# Altium PCB ultrazohm_digital_voltage_3U_1vxx.PcbDoc (part 4 of 4)
Units mm, origin at the board's own origin, x right, y up, seen from the top; angles counter-clockwise.
Board outline 155.99 x 100 mm, 4 copper layers (Top Layer, Layer 1, Layer 2, Bottom Layer), stack 0.98 mm thick; 148 components, 295 nets, 1106 pads, 423 vias.
Unrouted connection lines stored in the file: 171.
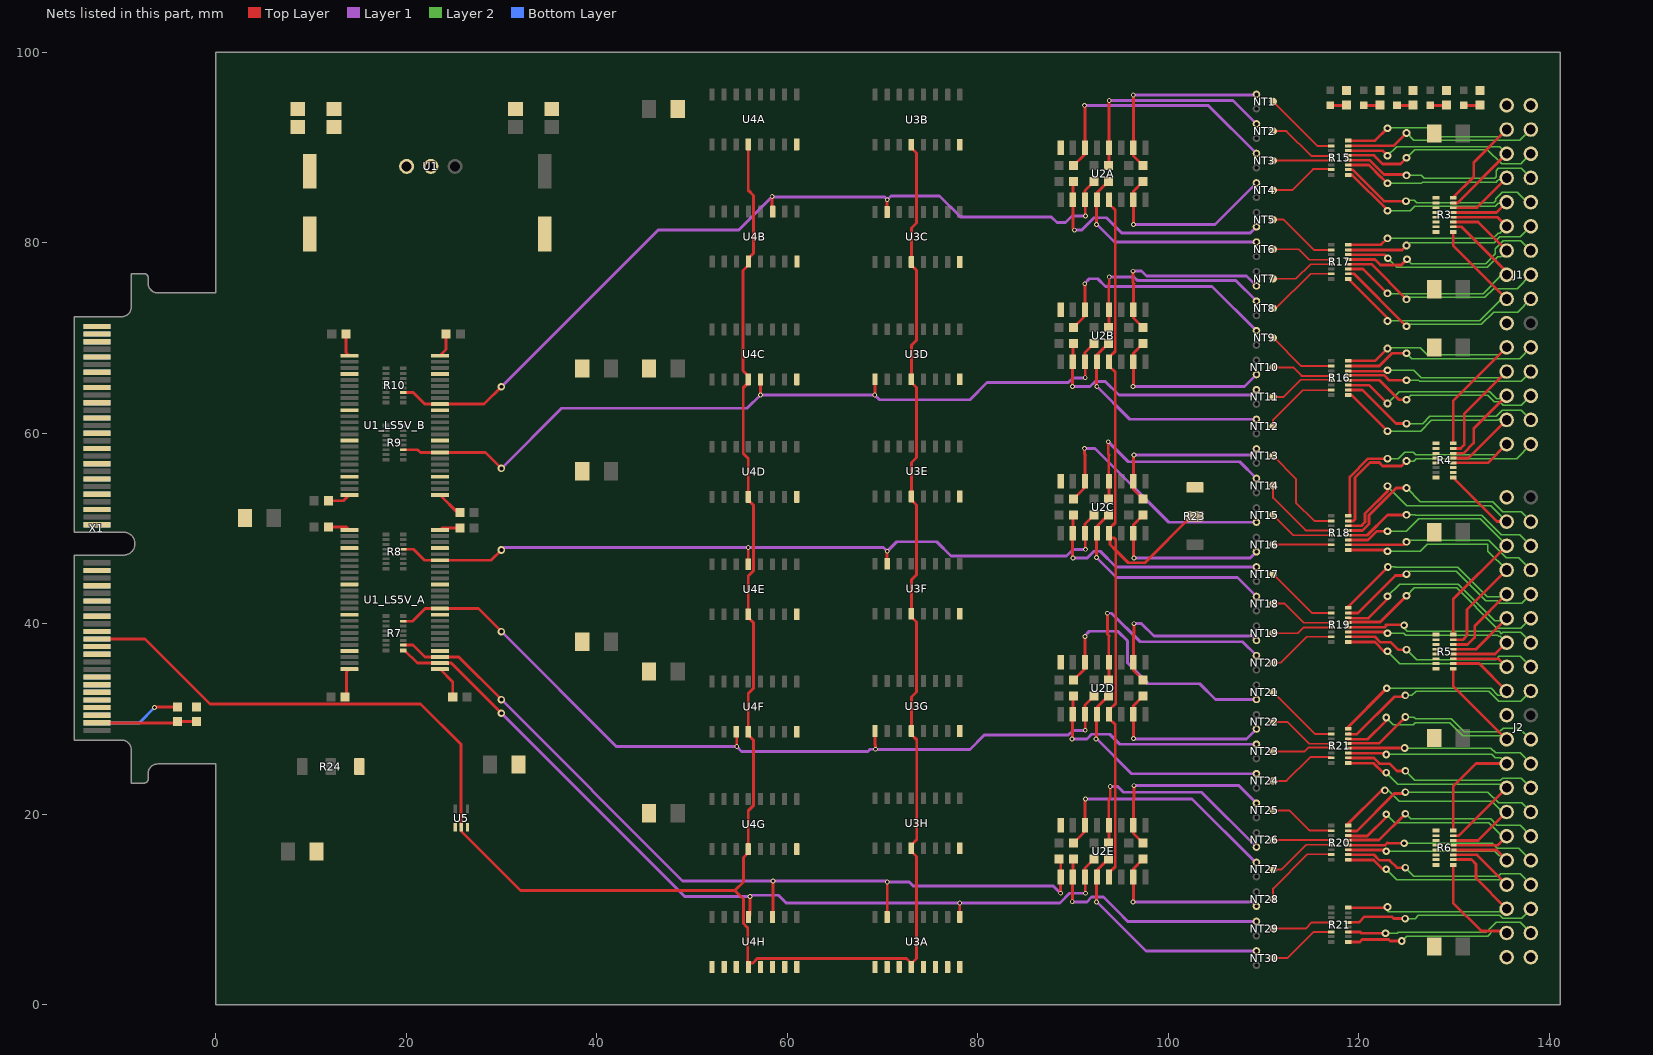
[diagram p5: the nets of this part, all layers, seen from the top]

## Via types
v1: diameter 0.5, hole 0.3, Top Layer to Bottom Layer, 244 vias
v2: diameter 0.8, hole 0.4, Top Layer to Bottom Layer, 120 vias
v3: diameter 0.5/0.5/0.5/0.5 (per signal layer), hole 0.3, Top Layer to Bottom Layer, 59 vias

## Nets (pads, with @x,y where several pads share a name; then routed paths per layer and width w, separated by ;. In a path a pad name is that pad's centre, name@x,y a point inside that pad or via, vN(x,y) a via of type N, cw(c..) or ccw(c..) an arc to the next point about the centre after c; other vN are vias at no path point) (continued)
DIG_IO_5V_E5: R7.10 R32E.1 U1_LS5V_A.3 U2E.9 U3A.15 U4H.11 | length 91
  Top Layer w0.3: R7.10@19.696,37.75 20.72,37.75 21.972,36.498 U1_LS5V_A.3@23.546,36.498 25.53,36.498 v2(30,32.028) ; U4H.11@58.468,9.225 58.5,9.257 v1(58.5,13) ; U3A.15@70.5,9.381 v3(70.5,12.9) ; R32E.1@88.55,15.3 88.71,15.14 U2E.9@88.71,13.4 ; U2E.9@88.68,13.55 88.68,11.72 v3(88.7,11.7)
  Layer 1 w0.3: v2(30,32.028) 49.028,13 v1(58.5,13) 70.4,13 v3(70.5,12.9) 72.807,12.9 73.257,12.45 87.95,12.45 v3(88.7,11.7) v3@88.68,11.72
DIG_IO_5V_F1: R10.11 R33A.1 U1_LS5V_B.16 U2A.11 U3C.15 U4B.11 | length 89.8
  Top Layer w0.3: R10.11@19.696,64.25 20.747,64.25 21.957,63.041 U1_LS5V_B.16@23.558,63.041 28.178,63.041 v2(30,64.862) ; U4B.11@58.42,83.406 v1(58.42,84.828) ; U3C.15@70.491,83.212 70.489,83.181 70.489,84.489 v1(70.5,84.5) ; U2A.11@91.25,84.5 91.25,85.45 R33A.1@92.2,86.4 ; U2A.11@91.28,84.65 91.28,82.82 v3(91.3,82.8)
  Layer 1 w0.3: v2(30,64.862) 46.438,81.3 54.9,81.3 v1@58.4,84.8 ; v1(58.42,84.828) v1@58.4,84.8 ; v3@91.28,82.82 v3(91.3,82.8) 89.9,82.8 89.2,82.1 88.3,82.1 87.7,82.7 78.2,82.7 76,84.9 70.9,84.9 v1(70.5,84.5) 70.2,84.8 v1@58.4,84.8
DIG_IO_5V_F2: R9.11 R33B.1 U1_LS5V_B.8 U2B.11 U3D.1 U4C.5 | length 87.1
  Top Layer w0.3: R9.11@19.696,58.25 21.207,58.25 21.497,57.961 U1_LS5V_B.8@23.558,57.961 28.336,57.961 v2(30,56.297) ; v1(57.19,64) U4C.5@57.19,65.644 ; v3@69.189,63.989 69.194,63.994 v3@69.2,64 ; U2B.11@91.25,67.5 91.25,68.45 R33B.1@92.2,69.4 ; v3@91.3,65.8 v3(91.28,65.82) ; v3@69.2,64 69.2,65.308 v3@69.2,64 ; v3(91.28,65.82) 91.28,67.5 91.28,67.65 v3(91.28,65.82)
  Layer 1 w0.3: v2(30,56.297) 36.312,62.608 55.798,62.608 v1(57.19,64) v3(69.189,64) ; v3@69.2,64 v3(69.189,64) ; v3(91.28,65.82) 91.3,65.8 89.992,65.8 89.492,65.3 80.976,65.3 79.176,63.5 69.689,63.5 v3(69.189,64)
DIG_IO_5V_F3: R8.13 R33C.1 U1_LS5V_A.19 U2C.11 U3F.15 U4E.13 | length 81.5
  Top Layer w0.3: R8.13@19.696,47.817 20.766,47.817 21.926,46.658 U1_LS5V_A.19@23.546,46.658 28.927,46.658 v2(30,47.731) ; U4E.13@55.92,46.239 v1(55.92,48) ; v1@70.4,47.5 v1@70.489,47.589 ; U3F.15@70.491,46.291 70.489,46.281 v1@70.489,47.589 ; v1(70.5,47.6) v1@70.489,47.589 ; U2C.11@91.25,49.5 91.25,50.45 R33C.1@92.2,51.4 ; U2C.11@91.28,49.65 91.28,47.82 v3(91.3,47.8)
  Layer 1 w0.3: v2(30,47.731) 30.269,48 v1(55.92,48) 70.1,48 v1(70.5,47.6) 71.5,48.6 75.7,48.6 77.2,47.1 89.3,47.1 90,47.8 v3(91.3,47.8) v3@91.28,47.82
DIG_IO_5V_F4: R7.15 R33D.1 U1_LS5V_A.11 U2D.11 U3G.1 U4F.3 | length 89.9
  Top Layer w0.3: R7.15@19.696,40.25 20.682,40.25 22.01,41.578 U1_LS5V_A.11@23.546,41.578 27.588,41.578 v2(30,39.165) ; v1(54.7,27.1) U4F.3@54.7,28.522 ; v1(69.258,26.823) 69.258,27.242 69.2,27.3 ; U2D.11@91.25,30.5 91.25,31.45 R33D.1@92.2,32.4 ; v3@91.3,28.8 v3(91.28,28.82) ; 69.194,27.294 69.189,27.289 69.194,27.294 ; 69.194,27.294 69.2,27.3 ; 69.194,27.294 69.2,27.3 ; 69.2,27.3 69.2,28.608 69.2,27.3 ; v3(91.28,28.82) 91.28,30.5 91.28,30.65 v3(91.28,28.82)
  Layer 1 w0.3: v2(30,39.165) 42.065,27.1 v1(54.7,27.1) 55.2,26.6 68.489,26.6 68.712,26.823 v1(69.258,26.823) 69.281,26.8 79.176,26.8 80.676,28.3 89.492,28.3 89.992,28.8 91.3,28.8 v3(91.28,28.82)
DIG_IO_5V_F5: R7.9 R33E.1 U1_LS5V_A.2 U2E.11 U3A.9 U4H.13 | length 90.8
  Top Layer w0.3: R7.9@19.696,37.2 19.846,37.2 21.183,35.863 U1_LS5V_A.2@23.546,35.863 24.738,35.863 v2(30,30.6) ; U4H.13@55.928,9.225 56.084,9.381 v1(56.084,11.377) ; U3A.9@78.111,9.392 v3(78.111,10.689) 78.111,10.7 v3@78.122,10.711 ; U2E.11@91.25,13.4 91.25,14.35 R33E.1@92.2,15.3 ; U2E.11@91.28,13.55 91.28,11.72 v3(91.3,11.7)
  Layer 1 w0.3: v2(30,30.6) 49.25,11.35 49.95,11.35 49.977,11.377 v1(56.084,11.377) 56.207,11.5 59.1,11.5 59.9,10.7 78.1,10.7 v3(78.111,10.689) 78.122,10.7 88.626,10.7 89.626,11.7 v3(91.3,11.7)
DIG_IO_N1: J1.17 R3.16 R15.16 | length 27.4
  Top Layer w0.285: R15.16@118.9,90.7 121.7,90.7 v2(123,92) ; R3.16@129.9,84.709 132.059,86.868 132.059,88.409 J1.17@135.513,91.863
  Layer 2 w0.15: v2(123,92) 123.075,92.075 127.355,92.075 128.31,91.12 134.77,91.12 J1.17@135.513,91.863
DIG_IO_N2: J1.18 R3.15 R15.14 | length 25.3
  Top Layer w0.285: R15.14@118.9,89.65 122.46,89.65 v2(123,89.11) ; R3.15@129.9,84.159 130.349,84.159 J1.18@135.513,89.323
  Layer 2 w0.15: v2(123,89.11) 123.956,90.066 134.77,90.066 J1.18@135.513,89.323
DIG_IO_N3: J1.19 R3.14 R15.11 | length 24.6
  Top Layer w0.285: R15.11@118.9,88.15 121.05,88.15 122.35,86.85 122.371,86.85 v2(123,86.221) ; R3.14@129.9,83.659 132.389,83.659 J1.19@135.513,86.783
  Layer 2 w0.15: v2(123,86.221) 126.555,86.221 126.684,86.35 134.416,86.35 134.533,86.467 134.683,86.617 135.347,86.617 J1.19@135.513,86.783
DIG_IO_N4: J1.20 R3.13 R15.9 | length 24.7
  Top Layer w0.285: R15.9@118.9,87.1 119.3,87.1 123,83.4 v2(123,83.331) ; R3.13@129.9,83.159 134.429,83.159 J1.20@135.513,84.243
  Layer 2 w0.15: v2(123,83.331) 125.415,83.331 125.884,83.8 134.316,83.8 134.433,83.917 134.633,84.117 135.387,84.117 J1.20@135.513,84.243
DIG_IO_N5: J1.21 R3.12 R17.16 | length 23.4
  Top Layer w0.285: R17.16@118.9,79.778 122.337,79.778 v2(123,80.441) ; R3.12@129.9,82.659 134.557,82.659 J1.21@135.513,81.703
  Layer 2 w0.15: v2(123,80.441) 134.075,80.441 134.517,80.883 134.634,81 134.81,81 J1.21@135.513,81.703
DIG_IO_N6: J1.22 R3.11 R17.14 | length 24.8
  Top Layer w0.285: R17.14@118.9,78.728 122.672,78.728 v2(123.05,78.35) ; R3.11@129.9,82.159 132.517,82.159 J1.22@135.513,79.163
  Layer 2 w0.15: v2(123.05,78.35) 123,78.3 123.1,78.3 124,77.4 133.466,77.4 134.583,78.517 134.867,78.517 J1.22@135.513,79.163
DIG_IO_N7: J1.23 R3.10 R17.11 | length 26.4
  Top Layer w0.285: R17.11@118.9,77.228 120.434,77.228 v2(123,74.662) ; R3.10@129.9,81.659 130.791,81.659 135.513,76.937 J1.23@135.513,76.623
  Layer 2 w0.15: v2(123,74.662) 123.025,74.637 133.035,74.637 135.021,76.623 J1.23@135.513,76.623
DIG_IO_N8: J1.24 R3.9 R17.9 | length 28.9
  Top Layer w0.285: R17.9@118.9,76.178 123,72.078 v2(123,71.772) ; R3.9@129.9,81.109 129.9,79.696 J1.24@135.513,74.083
  Layer 2 w0.15: v2(123,71.772) 123.042,71.814 132.703,71.814 134.971,74.083 J1.24@135.513,74.083
DIG_IO_N9: J1.26 R4.16 R16.16 | length 30.2
  Top Layer w0.285: R16.16@118.9,67.586 121.703,67.586 v2(123,68.883) ; R4.16@129.9,58.928 129.9,63.39 J1.26@135.513,69.003
  Layer 2 w0.15: v2(123,68.883) 123.072,68.954 126.433,68.954 127.164,68.223 134.733,68.223 J1.26@135.513,69.003
DIG_IO_N10: J1.27 R4.15 R16.14 | length 28.1
  Top Layer w0.285: R16.14@118.9,66.536 118.944,66.492 122.892,66.492 v2(123,66.6) ; R4.15@129.9,58.378 130.678,58.378 131.05,58.75 131.05,62 J1.27@135.513,66.463
  Layer 2 w0.15: v2(123,66.6) 125.766,66.6 126.533,65.833 134.883,65.833 J1.27@135.513,66.463
DIG_IO_N11: J1.28 R4.14 R16.11 | length 27.4
  Top Layer w0.285: R16.11@118.9,65.036 121.067,65.036 v2(123,63.103) ; R4.14@129.9,57.878 130.978,57.878 132.05,58.95 132.05,60.46 J1.28@135.513,63.923
  Layer 2 w0.15: v2(123,63.103) 124.247,64.35 133.716,64.35 134.483,63.583 135.173,63.583 J1.28@135.513,63.923
DIG_IO_N12: J1.29 R4.13 R16.9 | length 26
  Top Layer w0.285: R16.9@118.9,63.986 119.228,63.986 v2(123,60.214) ; R4.13@129.9,57.378 131.508,57.378 J1.29@135.513,61.383
  Layer 2 w0.15: v2(123,60.214) 126.48,60.214 127.616,61.35 134.566,61.35 134.683,61.467 135.429,61.467 J1.29@135.513,61.383
DIG_IO_N13: J1.30 R4.12 R18.16 | length 40.5
  Top Layer w0.285: R18.16@118.9,51.33 119.05,51.48 119.05,55.4 120.974,57.324 v2(123,57.324) ; R4.12@129.9,56.878 133.548,56.878 J1.30@135.513,58.843
  Layer 2 w0.15: J1.30@135.513,58.843 134.405,57.735 ; 124.124,57.324 124.8,58 ; 124.124,57.324 v2(123,57.324) 124.124,57.324 ; 124.124,57.324 124.8,58 ; 124.8,58 125.7,58 ; 124.8,58 125.7,58 ; 125.7,58 125.965,57.735 ; 125.7,58 125.965,57.735 ; 125.965,57.735 134.405,57.735 ; 125.965,57.735 134.405,57.735
DIG_IO_N14: J2.22 R4.9 R18.14 | length 30.6
  Top Layer w0.285: R18.14@118.9,50.28 120.28,50.28 120.65,50.65 120.65,51.55 123,53.9 v2(123,54.434) ; R4.9@129.9,55.328 134.513,50.715 J2.22@135.513,50.715
  Layer 2 w0.15: v2(123,54.434) 125.035,52.4 133.828,52.4 ; 133.828,52.4 J2.22@135.513,50.715 133.828,52.4
DIG_IO_N15: J2.23 R5.16 R18.11 | length 38.8
  Top Layer w0.285: R18.11@118.9,48.78 120.962,48.78 121.891,49.709 122.909,49.709 v2(123,49.709) ; R5.16@129.9,38.862 129.9,42.562 J2.23@135.513,48.175
  Layer 2 w0.15: J2.23@135.513,48.175 135.513,48.221 132.734,51 ; 124.993,49.709 126.284,51 ; 124.993,49.709 v2(123,49.709) 124.993,49.709 ; 126.284,51 132.734,51 ; 126.284,51 132.734,51
DIG_IO_N16: J2.24 R5.15 R18.9 | length 31.5
  Top Layer w0.285: R18.9@118.9,47.73 122.87,47.73 v2(123,47.6) ; R5.15@129.9,38.312 130.888,38.312 130.9,38.3 131.35,38.75 131.35,41.472 J2.24@135.513,45.635
  Layer 2 w0.15: v2(123,47.6) 126.459,47.6 127.2,48.341 133.466,48.341 133.533,48.273 133.533,47.614 ; 133.533,47.614 J2.24@135.513,45.635 133.533,47.614
DIG_IO_N17: J2.25 R5.14 R19.16 | length 28.4
  Top Layer w0.285: R19.16@118.9,41.678 118.9,41.8 v2(123.05,45.95) ; R5.14@129.9,37.812 131.412,37.812 132.15,38.55 132.15,39.732 J2.25@135.513,43.095
  Layer 2 w0.15: v2(123.05,45.95) 123.75,45.95 123.8,45.9 130.366,45.9 133.466,42.8 135.218,42.8 J2.25@135.513,43.095
DIG_IO_N18: J2.26 R5.13 R19.14 | length 26.9
  Top Layer w0.285: R19.14@118.9,40.628 118.944,40.584 121,40.584 123,42.584 v2(123,42.876) ; R5.13@129.9,37.312 132.27,37.312 J2.26@135.513,40.555
  Layer 2 w0.15: v2(123,42.876) 124.274,44.15 130.416,44.15 134.283,40.283 135.241,40.283 J2.26@135.513,40.555
DIG_IO_N19: J2.27 R5.12 R19.11 | length 23.2
  Top Layer w0.285: R19.11@118.9,39.128 122.772,39.128 122.9,39 v2(123,39) ; R5.12@129.9,36.812 134.31,36.812 J2.27@135.513,38.015
  Layer 2 w0.15: v2(123,39) 124.717,39 124.809,38.909 124.926,38.791 134.543,38.791 134.667,38.667 134.861,38.667 J2.27@135.513,38.015
DIG_IO_N20: J2.28 R5.11 R19.9 | length 23.8
  Top Layer w0.285: R19.9@118.9,38.078 121.672,38.078 122.653,37.097 v2(123,37.097) v2@123.129,37.226 ; R5.11@129.9,36.312 134.676,36.312 J2.28@135.513,35.475
  Layer 2 w0.15: v2(123,37.097) 124.297,35.8 135.188,35.8 J2.28@135.513,35.475
DIG_IO_N21: J2.29 R5.10 R21.16@118.9,28.978 | length 26
  Top Layer w0.285: R21.16@118.778,28.95 118.778,29.072 v2(122.928,33.222) ; R21.16@118.9,28.978 R21.16@118.969,28.909 ; R5.10@129.9,35.812 132.636,35.812 J2.29@135.513,32.935
  Layer 2 w0.15: v2(122.928,33.222) 126.278,33.222 126.3,33.2 133.9,33.2 134.6,32.5 135.078,32.5 J2.29@135.513,32.935
DIG_IO_N22: J2.31 R5.9 R21.14@118.9,27.928 | length 28.7
  Top Layer w0.285: R21.14@118.778,27.9 118.822,27.856 120.878,27.856 122.878,29.856 v2(122.878,30.148) ; R5.9@129.9,35.262 129.9,33.468 J2.31@135.513,27.855
  Layer 2 w0.15: v2(122.878,30.148) 123.626,29.4 125.7,29.4 125.901,29.601 129.55,29.601 130.901,28.25 135.118,28.25 J2.31@135.513,27.855
DIG_IO_N23: J2.32 R6.16 R21.11@118.9,26.428 | length 28.4
  Top Layer w0.285: R21.11@118.778,26.4 122.65,26.4 122.778,26.272 v2(122.878,26.272) ; R6.16@129.9,18.288 129.9,22.9 132.315,25.315 J2.32@135.513,25.315
  Layer 2 w0.15: v2(122.878,26.272) 133.962,26.272 134.317,25.917 134.911,25.917 J2.32@135.513,25.315
DIG_IO_N24: J2.33 R6.15 R21.9@118.9,25.378 | length 25.7
  Top Layer w0.285: R21.9@118.778,25.35 121.55,25.35 122.531,24.369 v2(122.878,24.369) v2@123.007,24.498 ; R6.15@129.9,17.738 130.476,17.738 J2.33@135.513,22.775
  Layer 2 w0.15: v2(122.878,24.369) 124.097,23.15 135.138,23.15 J2.33@135.513,22.775
DIG_IO_N25: J2.34 R6.14 R20.16 | length 26.1
  Top Layer w0.285: R20.16@118.778,18.8 118.778,18.922 122.356,22.5 v2(122.728,22.5) ; R6.14@129.9,17.238 132.516,17.238 J2.34@135.513,20.235
  Layer 2 w0.15: v2(122.728,22.5) 123.1,22.5 124.25,21.35 133.95,21.35 135.065,20.235 J2.34@135.513,20.235
DIG_IO_N26: J2.35 R6.13 R20.14 | length 24.8
  Top Layer w0.285: R20.14@118.778,17.75 118.822,17.706 120.878,17.706 122.878,19.706 v2(122.878,19.998) ; R6.13@129.9,16.738 134.556,16.738 J2.35@135.513,17.695
  Layer 2 w0.15: v2(122.878,19.998) 123.776,19.1 133.65,19.1 135.055,17.695 J2.35@135.513,17.695
DIG_IO_N27: J2.36 R6.12 R20.11 | length 23.2
  Top Layer w0.285: R20.11@118.778,16.25 122.65,16.25 122.778,16.122 v2(122.878,16.122) ; R6.12@129.9,16.238 134.43,16.238 J2.36@135.513,15.155
  Layer 2 w0.15: v2(122.878,16.122) 134.262,16.122 134.717,15.667 135.001,15.667 J2.36@135.513,15.155
DIG_IO_N28: J2.37 R6.11 R20.9 | length 24.9
  Top Layer w0.285: R20.9@118.778,15.2 121.55,15.2 122.531,14.219 v2(122.878,14.219) v2@123.007,14.348 ; R6.11@129.9,15.738 132.39,15.738 J2.37@135.513,12.615
  Layer 2 w0.15: v2(122.878,14.219) 123.997,13.1 135.028,13.1 J2.37@135.513,12.615
DIG_IO_N29: J2.38 R6.10 R21.16@118.9,10.2 | length 25.9
  Top Layer w0.285: R21.16@118.9,10.2 122.945,10.2 v2(123.005,10.26) ; R6.10@129.9,15.238 131.812,15.238 132.3,14.75 132.3,13.288 J2.38@135.513,10.075
  Layer 2 w0.15: v2(123.005,10.26) 123.005,9.75 135.188,9.75 J2.38@135.513,10.075
DIG_IO_N30: J2.39 R6.9 R21.9@118.9,6.6 | length 28.2
  Top Layer w0.285: R21.9@118.9,6.6 120.1,6.6 120.35,6.85 123.125,6.85 123.275,6.7 v2(124.5,6.7) ; R6.9@129.9,14.688 129.9,10.7 132.85,7.75 135.298,7.75 J2.39@135.513,7.535
  Layer 2 w0.15: v2(124.5,6.7) 125,7.2 133.524,7.2 134.074,7.75 135.298,7.75 J2.39@135.513,7.535
DIG_IO_P1: J1.2 R15.15 | length 20.5
  Top Layer w0.285: R15.15@118.9,90.15 123.65,90.15 v2(125,91.5)
  Layer 2 w0.15: v2(125,91.5) 125.78,90.72 136.91,90.72 J1.2@138.053,91.863
DIG_IO_P2: J1.3 R15.13 | length 21.3
  Top Layer w0.285: R15.13@118.9,89.15 121.6,89.15 122.5,88.25 124.35,88.25 v2(125,88.9)
  Layer 2 w0.15: v2(125,88.9) 125.85,89.75 133.5,89.75 135,88.25 137.1,88.25 137.1,88.37 J1.3@138.053,89.323
DIG_IO_P3: J1.4 R15.12 | length 21.2
  Top Layer w0.285: R15.12@118.9,88.65 121.132,88.65 122.641,87.141 124.909,87.141 v2(125,87.05)
  Layer 2 w0.15: v2(125,87.05) 126.55,87.05 126.85,86.75 134.25,86.75 134.4,86.9 134.4,87.55 134.65,87.8 137.036,87.8 J1.4@138.053,86.783
DIG_IO_P4: J1.5 R15.10 | length 21.7
  Top Layer w0.285: R15.10@118.9,87.65 119.332,87.65 122.632,84.35 v2(124.95,84.35)
  Layer 2 w0.15: v2(124.95,84.35) 125.05,84.45 125.8,84.45 126.05,84.2 134.15,84.2 134.35,84.4 134.35,84.6 135.05,85.3 136.6,85.3 137.657,84.243 J1.5@138.053,84.243
DIG_IO_P5: J1.6 R17.15 | length 20.2
  Top Layer w0.285: R17.15@118.9,79.228 124.538,79.228 v2(125,79.69)
  Layer 2 w0.15: v2(125,79.69) 125.31,80 134.2,80 134.8,80.6 136.95,80.6 J1.6@138.053,81.703
DIG_IO_P6: J1.7 R17.13 | length 21.6
  Top Layer w0.285: R17.13@118.9,78.228 121.672,78.228 122.25,77.65 124.45,77.65 v2(125.05,78.25)
  Layer 2 w0.15: v2(125.05,78.25) 125.5,77.8 133.3,77.8 134.3,78.8 134.3,79.35 135.15,80.2 137.016,80.2 J1.7@138.053,79.163
DIG_IO_P7: J1.8 R17.12 | length 21.8
  Top Layer w0.285: R17.12@118.9,77.728 121.306,77.728 v2(125,74.034)
  Layer 2 w0.15: v2(125,74.034) 125.202,74.237 133.201,74.237 134.134,75.169 136.6,75.169 J1.8@138.053,76.623
DIG_IO_P8: J1.9 R17.10 | length 22.6
  Top Layer w0.285: R17.10@118.9,76.728 119.479,76.728 v2(125,71.207)
  Layer 2 w0.15: v2(125,71.207) 125.207,71.414 132.869,71.414 134.134,72.679 136.649,72.679 J1.9@138.053,74.083
DIG_IO_P9: J1.11 R16.15 | length 20.4
  Top Layer w0.285: R16.15@118.9,67.036 122.136,67.036 123.479,68.379 v2(125,68.379)
  Layer 2 w0.15: v2(125,68.379) 125.556,67.823 136.873,67.823 J1.11@138.053,69.003
DIG_IO_P10: J1.12 R16.13 | length 19.9
  Top Layer w0.285: R16.13@118.9,66.036 118.944,66.08 122.623,66.08 123.151,65.552 v2(125,65.552)
  Layer 2 w0.15: v2(125,65.552) 126.248,65.552 126.367,65.433 137.023,65.433 J1.12@138.053,66.463
DIG_IO_P11: J1.13 R16.12 | length 21
  Top Layer w0.285: R16.12@118.9,65.536 122.188,65.536 124.224,63.5 v2(125,63.5)
  Layer 2 w0.15: v2(125,63.5) 125.45,63.95 133.55,63.95 134.2,63.3 134.75,63.3 135.15,62.9 137.03,62.9 J1.13@138.053,63.923
DIG_IO_P12: J1.14 R16.10 | length 21.6
  Top Layer w0.285: R16.10@118.9,64.536 120.36,64.536 123.897,61 v2(125,61)
  Layer 2 w0.15: v2(125,61) 126.7,61 127.45,61.75 134.4,61.75 135.05,62.4 137.036,62.4 J1.14@138.053,61.383
DIG_IO_P13: J1.15 R18.15 | length 25.4
  Top Layer w0.285: R18.15@118.9,50.78 119.43,50.78 119.6,50.95 119.6,55.35 121.162,56.912 122.138,56.912 122.5,56.55 124.481,56.55 v2(125,57.069)
  Layer 2 w0.15: v2(125,57.069) 125.781,57.069 126.047,57.334 136.544,57.334 J1.15@138.053,58.843
DIG_IO_P14: J2.2 R18.13 | length 33.5
  Top Layer w0.285: R18.13@118.9,49.78 120.362,49.78 121.062,50.479 121.062,51.379 123.924,54.241 v2(125,54.241)
  Layer 2 w0.15: v2(125,54.241) 126.441,52.8 ; 126.441,52.8 134.05,52.8 ; 126.441,52.8 134.05,52.8 ; 134.05,52.8 135.1,51.75 ; 134.05,52.8 135.1,51.75 ; 135.1,51.75 137.018,51.75 ; 137.018,51.75 J2.2@138.053,50.715 137.018,51.75
DIG_IO_P15: J2.3 R18.12 | length 35.8
  Top Layer w0.285: R18.12@118.9,49.28 120.88,49.28 123.014,51.414 v2(125,51.414)
  Layer 2 w0.15: 125.898,51.414 125.912,51.4 ; 125.898,51.414 v2(125,51.414) 125.898,51.414 ; 125.898,51.414 125.912,51.4 ; 125.912,51.4 132.9,51.4 ; 125.912,51.4 132.9,51.4 ; 132.9,51.4 134.95,49.35 ; 132.9,51.4 134.95,49.35 ; 134.95,49.35 136.878,49.35 ; 134.95,49.35 136.878,49.35 ; 136.878,49.35 J2.3@138.053,48.175 136.878,49.35
DIG_IO_P16: J2.4 R18.10 | length 23.4
  Top Layer w0.285: R18.10@118.9,48.28 124.694,48.28 v2(125,48.586)
  Layer 2 w0.15: J2.4@138.053,45.635 136.783,46.905 ; v2@125.155,48.741 133.632,48.741 134.576,47.797 134.576,47.787 ; v2@125.155,48.741 v2(125,48.586) v2@125.155,48.741 ; 134.576,47.787 135.458,46.905 ; 134.576,47.787 135.458,46.905 ; 135.458,46.905 136.783,46.905 ; 135.458,46.905 136.783,46.905
DIG_IO_P17: J2.5 R19.15 | length 22.7
  Top Layer w0.285: R19.15@118.9,41.128 119.91,41.128 123.832,45.05 124.85,45.05 v2(125,45.2)
  Layer 2 w0.15: v2(125,45.2) 125.3,45.5 130.2,45.5 133.3,42.4 134.5,42.4 134.75,42.15 137.108,42.15 J2.5@138.053,43.095
DIG_IO_P18: J2.6 R19.13 | length 22.9
  Top Layer w0.285: R19.13@118.9,40.128 118.944,40.172 122.241,40.172 v2(125,42.931)
  Layer 2 w0.15: v2(125,42.931) 125.819,43.75 130.25,43.75 134.35,39.65 134.4,39.65 134.55,39.5 136.998,39.5 J2.6@138.053,40.555
DIG_IO_P19: J2.7 R19.12 | length 20.4
  Top Layer w0.285: R19.12@118.9,39.628 122.72,39.628 122.85,39.758 122.85,39.9 124.691,39.9 v2(124.75,39.841)
  Layer 2 w0.15: v2(124.75,39.841) 124.75,39.533 125.091,39.191 134.709,39.191 134.95,38.95 135.1,39.1 136.968,39.1 J2.7@138.053,38.015
DIG_IO_P20: J2.8 R19.10 | length 20.8
  Top Layer w0.285: R19.10@118.9,38.628 121.704,38.628 122.291,38.041 123.359,38.041 124.124,37.276 v2(125,37.276)
  Layer 2 w0.15: v2(125,37.276) 126.076,36.2 134.35,36.2 134.65,36.5 134.65,36.6 136.928,36.6 J2.8@138.053,35.475
DIG_IO_P21: J2.9 R21.15@118.9,28.428 | length 22.1
  Top Layer w0.285: R21.15@118.778,28.4 119.788,28.4 123.71,32.322 124.728,32.322 v2(124.878,32.472) ; R21.15@118.9,28.428 R21.15@118.969,28.497
  Layer 2 w0.15: v2(124.878,32.472) 125.572,32.472 126.017,32.917 133.617,32.917 134.684,31.85 136.968,31.85 J2.9@138.053,32.935
DIG_IO_P22: J2.11 R21.13@118.9,27.428 | length 21.7
  Top Layer w0.285: R21.13@118.778,27.4 118.822,27.444 122.119,27.444 v2(124.878,30.203)
  Layer 2 w0.15: v2(124.878,30.203) 125.753,30.203 125.954,30.002 129.716,30.002 131.067,28.65 134.75,28.65 135.15,29.05 136.858,29.05 J2.11@138.053,27.855
DIG_IO_P23: J2.12 R21.12@118.9,26.928 | length 20
  Top Layer w0.285: R21.12@118.778,26.9 118.828,26.95 v2(124.8,26.95)
  Layer 2 w0.15: v2(124.8,26.95) 133.85,26.95 134.35,26.45 136.918,26.45 J2.12@138.053,25.315
DIG_IO_P24: J2.13 R21.10@118.9,25.928 | length 20.8
  Top Layer w0.285: R21.10@118.778,25.9 121.582,25.9 122.169,25.313 123.237,25.313 124.002,24.548 v2(124.878,24.548)
  Layer 2 w0.15: v2(124.878,24.548) 125.876,23.55 134.85,23.55 135.1,23.8 137.028,23.8 J2.13@138.053,22.775
DIG_IO_P25: J2.14 R20.15 | length 21.8
  Top Layer w0.285: R20.15@118.778,18.25 119.788,18.25 123.71,22.172 124.728,22.172 v2(124.878,22.322)
  Layer 2 w0.15: v2(124.878,22.322) 133.544,22.322 134.683,21.183 137.105,21.183 J2.14@138.053,20.235
DIG_IO_P26: J2.15 R20.13 | length 21.4
  Top Layer w0.285: R20.13@118.778,17.25 118.822,17.294 122.119,17.294 v2(124.878,20.053)
  Layer 2 w0.15: v2(124.878,20.053) 125.431,19.5 133.816,19.5 134.483,18.833 136.915,18.833 J2.15@138.053,17.695
DIG_IO_P27: J2.16 R20.12 | length 20.1
  Top Layer w0.285: R20.12@118.778,16.75 122.743,16.75 122.993,17 123,17 123.05,16.95 v2(124.75,16.95)
  Layer 2 w0.15: v2(124.75,16.95) 134,16.95 134.5,16.45 136.758,16.45 J2.16@138.053,15.155
DIG_IO_P28: J2.17 R20.10 | length 20.8
  Top Layer w0.285: R20.10@118.778,15.75 121.582,15.75 122.169,15.163 123.237,15.163 124.002,14.398 v2(124.878,14.398)
  Layer 2 w0.15: v2(124.878,14.398) 125.776,13.5 134.65,13.5 134.9,13.75 136.918,13.75 J2.17@138.053,12.615
DIG_IO_P29: J2.18 R21.13@118.9,8.65 | length 20.2
  Top Layer w0.285: R21.13@118.9,8.65 120,8.65 120.6,9.25 123.45,9.25 123.65,9.05 v2(124.85,9.05)
  Layer 2 w0.15: v2(124.85,9.05) 125.9,9.05 126.25,9.4 134.8,9.4 135.1,9.1 137.078,9.1 J2.18@138.053,10.075
DIG_IO_P30: J2.19 R21.11@118.9,7.65 | length 20.2
  Top Layer w0.285: R21.11@118.9,7.65 120.15,7.65 120.3,7.5 v2(122.792,7.5)
  Layer 2 w0.15: v2(122.792,7.5) 124,7.5 124.017,7.483 124.134,7.6 133.358,7.6 134.408,8.65 136.938,8.65 J2.19@138.053,7.535
DIG_O_15V_A1: NT1.1 R29A.2 U2A.2 | length 20.9
  Top Layer w0.3: v3@96.3,95.5 96.33,95.47 U2A.2@96.33,89.95 96.33,89.095 R29A.2@97.35,88.075
  Layer 1 w0.3: v3@96.33,95.47 96.3,95.5 109.2,95.5 NT1.1@109.25,95.55
  other v3: 96.315,95.485
DIG_O_15V_A2: NT7.2 R29B.2 U2B.2 | length 20
  Top Layer w0.3: v1(96.3,77) 96.3,75.8 96.4,75.7 96.35,75.65 96.35,72.95 U2B.2@96.33,72.95 96.33,72.095 R29B.2@97.35,71.075
  Layer 1 w0.3: v1(96.3,77) 97.2,77 97.7,76.5 108.2,76.5 NT7.2@109.25,75.45
DIG_O_15V_A3: NT13.1 R29C.2 U2C.2 | length 21.2
  Top Layer w0.3: v3@96.3,57.7 v3(96.4,57.7) v3@96.35,57.65 ; R29C.2@97.35,53.075 96.33,54.095 U2C.2@96.33,54.95 U2C.2@96.35,54.95 ; U2C.2@96.35,54.95 v3@96.35,57.65 ; U2C.2@96.35,54.95 v3@96.35,57.65
  Layer 1 w0.3: v3@96.35,57.65 96.3,57.7 108.6,57.7 NT13.1@109.25,58.35
DIG_O_15V_A4: NT19.2 R29D.2 U2D.2 | length 22.7
  Top Layer w0.3: v1(96.4,40) 96.4,38.9 96.3,38.8 96.4,38.7 96.35,38.65 ; R29D.2@97.35,34.075 96.33,35.095 U2D.2@96.33,35.95 U2D.2@96.35,35.95 ; U2D.2@96.35,35.95 96.35,38.65 ; U2D.2@96.35,35.95 96.35,38.65
  Layer 1 w0.3: v1(96.4,40) 97.2,40 98.5,38.7 108.8,38.7 NT19.2@109.25,38.25
DIG_O_15V_A5: NT25.1 R29E.2 U2E.2 | length 20.1
  Top Layer w0.3: v1(96.4,23) 96.4,21.6 96.35,21.55 96.35,18.85 U2E.2@96.33,18.85 96.33,17.995 R29E.2@97.35,16.975
  Layer 1 w0.3: v1(96.4,23) 107.4,23 NT25.1@109.25,21.15
DIG_O_15V_B1: NT2.1 R30A.2 U2A.4 | length 23.3
  Top Layer w0.3: R30A.2@93.7,88.075 93.79,88.165 U2A.4@93.79,89.95 93.79,94.89 v3(93.8,94.9)
  Layer 1 w0.3: v3@93.79,94.89 v3(93.8,94.9) 106.8,94.9 NT2.1@109.25,92.45
DIG_O_15V_B2: NT8.1 R30B.2 U2B.4 | length 21.9
  Top Layer w0.3: R30B.2@93.7,71.075 93.79,71.165 U2B.4@93.79,72.95 93.75,72.95 93.75,75.65 93.8,75.7 v1(93.8,76.4)
  Layer 1 w0.3: v1(93.8,76.4) 96.4,76.4 96.8,76 107.1,76 NT8.1@109.25,73.85
DIG_O_15V_B3: NT14.1 R30C.2 U2C.4 | length 23.3
  Top Layer w0.3: R30C.2@93.7,53.075 93.79,53.165 U2C.4@93.79,54.95 93.75,54.95 93.75,57.65 93.8,57.7 93.7,57.8 v1(93.7,59.1)
  Layer 1 w0.3: v1(93.7,59.1) 95.8,57 107.5,57 NT14.1@109.25,55.25
DIG_O_15V_B4: NT20.1 R30D.2 U2D.4 | length 24.7
  Top Layer w0.3: v1(93.6,41.1) 93.6,38.9 93.8,38.7 93.75,38.65 93.75,35.95 U2D.4@93.79,35.95 93.79,34.165 R30D.2@93.7,34.075
  Layer 1 w0.3: v1(93.6,41.1) 94.05,41.1 97.05,38.1 107.8,38.1 NT20.1@109.25,36.65
DIG_O_15V_B5: NT26.2 R30E.2 U2E.4 | length 24
  Top Layer w0.3: R30E.2@93.7,16.975 93.79,17.065 U2E.4@93.79,18.85 93.75,18.85 93.75,21.55 93.9,21.7 v1(93.9,22.9)
  Layer 1 w0.3: v1(93.9,22.9) 94.7,22.9 95.3,22.3 103.5,22.3 NT26.2@109.25,16.55
DIG_O_15V_C1: NT3.1 R31A.2 U2A.6 | length 27.1
  Top Layer w0.3: R31A.2@90.05,88.075 91.25,89.275 U2A.6@91.25,89.95 91.25,94.35 v3(91.2,94.4)
  Layer 1 w0.3: v3@91.25,94.35 v3(91.2,94.4) 104.2,94.4 NT3.1@109.25,89.35
DIG_O_15V_C2: NT9.1 R31B.2 U2B.6 | length 25.8
  Top Layer w0.3: R31B.2@90.05,71.075 91.25,72.275 U2B.6@91.25,72.95 91.25,75.65 91.3,75.7 v3@91.2,75.7
  Layer 1 w0.3: v3@91.25,75.65 v3(91.225,75.675) 91.2,75.7 91.7,76.2 92.6,76.2 93.4,75.4 104.6,75.4 NT9.1@109.25,70.75
DIG_O_15V_C3: NT15.2 R31C.2 U2C.6 | length 27.1
  Top Layer w0.3: R31C.2@90.05,53.075 91.25,54.275 U2C.6@91.25,54.95 91.25,57.65 91.3,57.7 91.2,57.8 v1(91.2,58.4)
  Layer 1 w0.3: v1(91.2,58.4) 92.293,58.4 92.993,57.7 100.043,50.65 NT15.2@109.25,50.65
DIG_O_15V_C4: NT21.2 R31D.2 U2D.6 | length 27.9
  Top Layer w0.3: R31D.2@90.05,34.075 91.25,35.275 U2D.6@91.25,35.95 v3(91.25,38.65) 91.3,38.7 v3@91.2,38.7
  Layer 1 w0.3: v3(91.25,38.65) 91.2,38.7 91.7,39.2 94.7,39.2 95.7,38.2 95.7,35.9 97.9,33.7 103.3,33.7 104.95,32.05 NT21.2@109.25,32.05
DIG_O_15V_C5: NT27.1 R31E.2 U2E.6 | length 26.2
  Top Layer w0.3: R31E.2@90.05,16.975 91.25,18.175 U2E.6@91.25,18.85 91.25,21.55 v3(91.3,21.6) v3@91.2,21.6
  Layer 1 w0.3: v3@91.25,21.55 91.2,21.6 v3(91.3,21.6) 102.5,21.6 109.2,14.9 NT27.1@109.25,14.95
DIG_O_15V_D1: NT4.1 R34A.2 U2A.15 | length 22.6
  Top Layer w0.3: U2A.15@96.33,84.5 96.33,85.38 R34A.2@97.35,86.4 ; v3@96.4,81.9 96.3,81.9 v3@96.35,81.95 ; v3@96.35,81.95 96.35,84.5 96.35,84.65 v3@96.35,81.95
  Layer 1 w0.3: v3@96.35,81.95 96.4,81.9 104.9,81.9 NT4.1@109.25,86.25
  other v3: 96.35,81.9
DIG_O_15V_D2: NT10.2 R34B.2 U2B.15 | length 21.3
  Top Layer w0.3: U2B.15@96.33,67.5 96.33,68.38 R34B.2@97.35,69.4 ; v3@96.4,64.9 v3(96.3,64.9) v3@96.35,64.95 ; v3@96.35,64.95 96.35,67.5 96.35,67.65 v3@96.35,64.95
  Layer 1 w0.3: v3@96.35,64.95 96.4,64.9 108,64.9 NT10.2@109.25,66.15
DIG_O_15V_D3: NT16.2 R34C.2 U2C.15 | length 21.1
  Top Layer w0.3: U2C.15@96.33,49.5 96.33,50.38 R34C.2@97.35,51.4 ; v3@96.35,46.95 96.3,46.9 v3(96.4,46.9) ; v3@96.35,46.95 96.35,49.5 96.35,49.65 v3@96.35,46.95
  Layer 1 w0.3: v3@96.35,46.95 v3(96.4,46.9) 108.6,46.9 NT16.2@109.25,47.55
DIG_O_15V_D4: NT22.2 R34D.2 U2D.15 | length 21.2
  Top Layer w0.3: U2D.15@96.33,30.5 96.33,31.38 R34D.2@97.35,32.4 ; v3@96.4,27.9 96.3,27.9 v3(96.35,27.95) ; v3(96.35,27.95) 96.35,30.5 96.35,30.65 v3(96.35,27.95)
  Layer 1 w0.3: v3(96.35,27.95) 96.4,27.9 108.2,27.9 NT22.2@109.25,28.95
DIG_O_15V_D5: NT28.2 R34E.2 U2E.15 | length 21
  Top Layer w0.3: U2E.15@96.33,13.4 96.33,14.28 R34E.2@97.35,15.3 ; v3@96.35,10.85 v3(96.3,10.8) v3@96.4,10.8 ; v3@96.35,10.85 96.35,13.4 96.35,13.55 v3@96.35,10.85
  Layer 1 w0.3: v3@96.35,10.85 96.4,10.8 108.8,10.8 NT28.2@109.25,10.35
DIG_O_15V_E1: NT5.2 R32A.2 U2A.10 | length 25.9
  Top Layer w0.3: U2A.10@89.95,84.5 U2A.10@89.95,84.65 ; R32A.2@90.05,86.4 89.98,86.33 U2A.10@89.98,84.5 89.98,81.42 90.1,81.3 v1(90.163,81.3)
  Layer 1 w0.3: v1(90.163,81.3) 90.9,81.3 92.2,82.6 93.515,82.6 95.115,81 108.6,81 NT5.2@109.25,81.65
DIG_O_15V_E2: NT11.1 R32B.2 U2B.10 | length 27.8
  Top Layer w0.3: U2B.10@89.98,67.5 89.98,69.33 R32B.2@90.05,69.4 ; v3@90,64.9 89.9,64.9 v3@89.95,64.95 ; v3@89.95,64.95 89.95,67.5 89.95,67.65 v3@89.95,64.95
  Layer 1 w0.3: v3@89.95,64.95 90,64.9 91.793,64.9 92.293,65.4 93.421,65.4 94.821,64 108.7,64 NT11.1@109.25,64.55
  other v3: 89.95,64.9
DIG_O_15V_E3: NT17.1 R32C.2 U2C.10 | length 25.1
  Top Layer w0.3: U2C.10@89.95,49.65 89.95,46.95 89.9,46.9 v3(90,46.9) ; U2C.10@89.98,49.5 89.98,51.33 R32C.2@90.05,51.4
  Layer 1 w0.3: v3@89.95,46.95 v3(90,46.9) 91.5,46.9 92.2,47.6 92.849,47.6 94.499,45.95 NT17.1@109.25,45.95
DIG_O_15V_E4: NT23.1 R32D.2 U2D.10 | length 27.5
  Top Layer w0.3: U2D.10@89.98,30.5 89.98,32.33 R32D.2@90.05,32.4 ; v3@90,27.9 v3(89.9,27.9) v3@89.95,27.95 ; v3@89.95,27.95 89.95,30.5 89.95,30.65 v3@89.95,27.95
  Layer 1 w0.3: v3@89.95,27.95 90,27.9 91.45,27.9 91.95,28.4 93.859,28.4 94.909,27.35 NT23.1@109.25,27.35
DIG_O_15V_E5: NT29.1 R32E.2 U2E.10 | length 28.1
  Top Layer w0.3: U2E.10@89.98,13.4 89.98,15.23 R32E.2@90.05,15.3 ; v3@90,10.8 89.9,10.8 v3@89.95,10.85 ; v3@89.95,10.85 89.95,13.4 89.95,13.55 v3@89.95,10.85
  Layer 1 w0.3: v3@89.95,10.85 90,10.8 91.45,10.8 91.95,11.3 93.197,11.3 94.597,9.9 95.747,8.75 NT29.1@109.25,8.75
  other v3: 89.925,10.825
DIG_O_15V_F1: NT6.1 R33A.2 U2A.12 | length 25.5
  Top Layer w0.3: v3@92.5,81.9 92.4,81.9 v3@92.45,81.95 ; U2A.12@92.52,84.5 92.52,85.22 R33A.2@93.7,86.4 ; v3@92.45,81.95 92.45,84.5 92.45,84.65 v3@92.45,81.95
  Layer 1 w0.3: v3@92.45,81.95 94.35,80.05 NT6.1@109.25,80.05
  other v3: 92.45,81.9
DIG_O_15V_F2: NT12.1 R33B.2 U2B.12 | length 26.2
  Top Layer w0.3: v3(92.5,64.9) 92.4,64.9 v3@92.45,64.95 ; U2B.12@92.52,67.5 92.52,68.22 R33B.2@93.7,69.4 ; v3@92.45,64.95 92.45,67.5 92.45,67.65 v3@92.45,64.95
  Layer 1 w0.3: v3@92.45,64.95 95.95,61.45 NT12.1@109.25,61.45
DIG_O_15V_F3: NT18.1 R33C.2 U2C.12 | length 26.5
  Top Layer w0.3: v3@92.5,46.9 92.4,46.9 v3(92.45,46.95) ; U2C.12@92.52,49.5 92.52,50.22 R33C.2@93.7,51.4 ; v3(92.45,46.95) 92.45,49.5 92.45,49.65 v3(92.45,46.95)
  Layer 1 w0.3: v3(92.45,46.95) 92.5,46.9 94.55,44.85 107.25,44.85 NT18.1@109.25,42.85
DIG_O_15V_F4: NT24.1 R33D.2 U2D.12 | length 26.3
  Top Layer w0.3: v3@92.5,27.9 v3(92.4,27.9) v3@92.45,27.95 ; U2D.12@92.52,30.5 92.52,31.22 R33D.2@93.7,32.4 ; v3@92.45,27.95 92.45,30.5 92.45,30.65 v3@92.45,27.95
  Layer 1 w0.3: v3@92.45,27.95 96.15,24.25 NT24.1@109.25,24.25
DIG_O_15V_F5: NT30.1 R33E.2 U2E.12 | length 26.9
  Top Layer w0.3: v3@92.5,10.8 92.4,10.8 v3@92.45,10.85 ; U2E.12@92.52,13.4 92.52,14.12 R33E.2@93.7,15.3 ; v3@92.45,10.85 92.45,13.4 92.45,13.55 v3@92.45,10.85
  Layer 1 w0.3: v3@92.45,10.85 92.5,10.8 93.4,9.9 97.65,5.65 NT30.1@109.25,5.65
  other v3: 92.45,10.8
DIG_Res_01: X1.77
DIG_Res_02: X1.78
DIG_Res_03: X1.89
DIG_Res_04: X1.90
DIG_Res_05: X1.91
DIG_Res_06: X1.92
DIG_Res_07: X1.93
ENABLE: U3A.4 U3B.4 U3C.4 U3D.4 U3E.4 U3F.4 U3G.4 U3H.4 U4A.4 U4B.4 U4C.4 U4D.4 U4E.4 U4F.4 U4G.4 U4H.4 U5.2 X1.75 | length 280.5
  Top Layer w0.3: X1.75@-12.44,38.391 -7.391,38.391 -0.575,31.575 21.525,31.575 25.75,27.35 25.75,18.7 U5.2@25.8,18.65 25.8,18.2 32,12 54.5,12 ; U4H.4@55.854,4.048 55.854,4.275 55.854,8.074 55.403,8.525 55.403,11.097 54.5,12 ; U4A.4@55.92,90.3 55.92,85.495 56.465,84.95 56.465,78.875 55.94,78.35 U4B.4@55.94,78 55.94,77.65 55.36,77.07 55.36,66.554 55.92,65.994 U4C.4@55.92,65.644 55.92,65.294 55.395,64.769 55.395,57.867 55.92,57.342 U4D.4@55.92,53.317 55.92,52.967 56.445,52.442 56.445,45.539 55.92,45.014 U4E.4@55.92,40.989 55.92,40.639 56.445,40.114 56.445,33.212 55.92,32.687 U4F.4@55.92,28.661 55.92,28.311 56.445,27.786 56.445,20.884 55.92,20.359 U4G.4@55.92,16.333 55.92,15.983 55.403,15.466 55.403,12.903 54.5,12 ; U4H.4@55.928,3.975 55.928,4.275 56.053,4.4 56.398,4.4 56.848,4.85 72.506,4.85 U3A.4@73.031,4.325 ; U3A.4@73.031,3.975 U3A.4@73.031,4.325 ; U3B.4@73.031,90.269 73.031,89.919 73.556,89.394 73.556,82.055 73.031,81.53 U3C.4@73.031,77.962 73.031,77.612 73.556,77.087 73.556,69.748 73.031,69.223 U3D.4@73.031,65.655 73.031,65.305 73.556,64.78 73.556,57.441 73.031,56.916 U3E.4@73.031,53.348 73.031,52.998 73.556,52.473 73.556,45.134 73.031,44.609 U3F.4@73.031,41.041 73.031,40.691 73.556,40.166 73.556,32.827 73.031,32.302 U3G.4@73.031,28.734 73.031,28.384 73.6,27.815 73.6,17.346 73.031,16.777 U3H.4@73.031,16.427 73.031,16.077 73.556,15.552 73.556,4.85 U3A.4@73.031,4.325
GND: C1.2 C2.2 C3.1 C4.1 C5.1 C6.1 C7.1 C8.1 C9.1 C10.1 C11.1 C12.1 C13.1 C14.1 C15.1 C16.1 C17.1 C18.1 C19.1 C20.1 C23.1 C24.1 J1.16 J1.25 J2.20 J2.21 J2.30 J2.40 R2.1 R3.1 R3.2 R3.3 R3.4 R3.5 R3.6 R3.7 R3.8 R4.1 R4.2 R4.3 R4.4 R4.5 R4.8 R4.10 R4.11 R5.1 R5.2 R5.3 R5.4 R5.5 R5.6 R5.7 R5.8 R6.1 R6.2 R6.3 R6.4 R6.5 R6.6 R6.7 R6.8 R23.3 R24.3 R35.2 R36.2 R37.2 R38.2 R39.2 U1.2 U1_LS5V_A.4 U1_LS5V_A.10 U1_LS5V_A.15 U1_LS5V_A.21 U1_LS5V_A.28 U1_LS5V_A.34 U1_LS5V_A.39 U1_LS5V_A.45 U1_LS5V_B.4 U1_LS5V_B.10 U1_LS5V_B.15 U1_LS5V_B.21 U1_LS5V_B.28 U1_LS5V_B.34 U1_LS5V_B.39 U1_LS5V_B.45 U2A.8 U2B.8 U2C.8 U2D.8 U2E.8 U3A.8 U3B.8 U3C.8 U3D.8 U3E.8 U3F.8 U3G.8 U3H.8 U4A.8 U4B.8 U4C.8 U4D.8 U4E.8 U4F.8 U4G.8 U4H.8 U5.1 U5.3 X1.1 X1.2 X1.5 X1.6 X1.9 X1.10 X1.13 X1.14 X1.17 X1.18 X1.21 X1.22 X1.25 X1.26 X1.29 X1.30 X1.33 X1.34 X1.37 X1.38 X1.41 X1.42 X1.45 X1.46 X1.49 X1.50 X1.53 X1.54 X1.57 X1.58 X1.61 X1.62 X1.65 X1.66 X1.69 X1.70 X1.73 X1.74 X1.79 X1.80 X1.85 X1.86 X1.95 X1.96
I2C0_SCA: X1.88
I2C0_SCL: X1.87
NetD1_1: D1.1 R35.1 | length 1.7
  Top Layer w0.3: D1.1@117,94.4 118.65,94.4 R35.1@118.7,94.45
NetD2_1: D2.1 R36.1 | length 1.7
  Top Layer w0.3: D2.1@120.5,94.4 122.15,94.4 R36.1@122.2,94.45
NetD3_1: D3.1 R37.1 | length 1.7
  Top Layer w0.3: D3.1@124,94.4 125.65,94.4 R37.1@125.7,94.45
NetD4_1: D4.1 R38.1 | length 1.7
  Top Layer w0.3: D4.1@127.5,94.4 129.15,94.4 R38.1@129.2,94.45
NetD5_1: D5.1 R39.1 | length 1.7
  Top Layer w0.3: D5.1@131,94.4 132.65,94.4 R39.1@132.7,94.45
NetR1_LS5V_A_2: R1_LS5V_A.2 U1_LS5V_A.1 | length 3.5
  Top Layer w0.3: U1_LS5V_A.1@23.546,35.228 24.9,33.874 R1_LS5V_A.2@24.9,32.3
NetR1_LS5V_B_2: R1_LS5V_B.2 U1_LS5V_B.1 | length 2.9
  Top Layer w0.3: U1_LS5V_B.1@23.558,53.516 25.424,51.65 R1_LS5V_B.2@25.65,51.65
NetR2_LS5V_A_2: R2_LS5V_A.2 U1_LS5V_A.48 | length 3.1
  Top Layer w0.3: R2_LS5V_A.2@13.6,32.3 13.75,32.45 13.75,34.932 U1_LS5V_A.48@14.046,35.228
NetR2_LS5V_B_2: R2_LS5V_B.2 U1_LS5V_B.48 | length 2.5
  Top Layer w0.3: R2_LS5V_B.2@11.85,52.9 13.443,52.9 U1_LS5V_B.48@14.058,53.516
NetR3_LS5V_A_1: R3_LS5V_A.1 U1_LS5V_A.24 | length 2.2
  Top Layer w0.3: U1_LS5V_A.24@23.546,49.833 23.763,50.05 R3_LS5V_A.1@25.65,50.05
NetR3_LS5V_B_1: R3_LS5V_B.1 U1_LS5V_B.24 | length 2.5
  Top Layer w0.3: U1_LS5V_B.24@23.558,68.121 24.2,68.762 R3_LS5V_B.1@24.2,70.4
NetR4_LS5V_A_1: R4_LS5V_A.1 U1_LS5V_A.25 | length 2.3
  Top Layer w0.3: R4_LS5V_A.1@11.85,50.15 13.728,50.15 U1_LS5V_A.25@14.046,49.833
NetR4_LS5V_B_1: R4_LS5V_B.1 U1_LS5V_B.25 | length 2.4
  Top Layer w0.3: R4_LS5V_B.1@13.7,70.4 13.7,68.479 U1_LS5V_B.25@14.058,68.121
NetR23_2: R23.2 U2A.13 U2B.13 U2C.13 U2D.13 U2E.13 | length 86.4
  Top Layer w0.3: U2E.13@93.79,13.4 93.79,13.85 94.425,14.485 94.425,29.415 93.79,30.05 U2D.13@93.79,30.5 93.79,30.95 94.478,31.638 94.478,47.715 ; U2A.13@93.79,84.5 93.79,84.05 94.425,83.415 94.425,68.585 93.79,67.95 U2B.13@93.79,67.5 93.79,67.05 94.425,66.415 94.425,50.585 93.79,49.95 U2C.13@93.79,49.5 ; R23.2@102.8,51.3 102.45,51.3 97.55,46.4 95.793,46.4 94.478,47.715 ; U2C.13@93.79,49.5 93.866,49.424 U2C.13@93.866,49.124 ; U2C.13@93.79,49.5 93.79,49.2 U2C.13@93.866,49.124 ; U2C.13@93.866,49.124 93.866,48.326 94.478,47.715 ; U2C.13@93.866,49.124 93.965,49.025 94.265,49.025 94.478,48.812 94.478,47.715
NetU3A_1: U3A.1
NetU3A_2: U3A.2
NetU3A_3: U3A.3
NetU3A_5: U3A.5
NetU3A_6: U3A.6
NetU3A_7: U3A.7
NetU4H_1: U4H.1
NetU4H_2: U4H.2
NetU4H_3: U4H.3
NetU4H_5: U4H.5
NetU4H_6: U4H.6
NetU4H_7: U4H.7
PILOT_IN: R1.2 X1.98 | length 9.1
  Top Layer w0.3: v1(-6.4,31.2) -6.35,31.25 R1.2@-4,31.25
  Bottom Layer w0.3: X1.98@-12.44,29.591 -8.009,29.591 v1(-6.4,31.2)
PILOT_OUT: R1.1 R2.2 X1.97 | length 10.5
  Top Layer w0.3: X1.97@-12.44,29.591 -4.159,29.591 R1.1@-4,29.75 R2.2@-2,29.75
PS_DIG_GPIO_02: X1.76
UNTERM1: NT1.3 R15.2 | length 8
  Top Layer w0.2: NT1.3@111,94.8 115.65,90.15 R15.2@117.1,90.15
UNTERM2: NT2.3 R15.4 | length 7.2
  Top Layer w0.2: NT2.3@111,91.7 112.4,91.7 115,89.1 117.05,89.1 R15.4@117.1,89.15
UNTERM3: NT3.3 R15.5 | length 6.1
  Top Layer w0.2: NT3.3@111,88.6 117.05,88.6 R15.5@117.1,88.65
UNTERM4: NT4.3 R15.7 | length 7
  Top Layer w0.2: NT4.3@111,85.5 113,85.5 115.2,87.7 117.05,87.7 R15.7@117.1,87.65
UNTERM5: NT5.3 R17.2 | length 7.4
  Top Layer w0.2: NT5.3@111,82.4 112.1,82.4 115.3,79.2 117.072,79.2 R17.2@117.1,79.228
UNTERM6: NT6.3 R17.4 | length 6.6
  Top Layer w0.2: NT6.3@111,79.3 113.7,79.3 114.8,78.2 117.072,78.2 R17.4@117.1,78.228
UNTERM7: NT7.3 R17.5 | length 6.7
  Top Layer w0.2: NT7.3@111,76.2 113.4,76.2 114.928,77.728 R17.5@117.1,77.728
UNTERM8: NT8.3 R17.7 | length 7.6
  Top Layer w0.2: NT8.3@111,73.1 111.3,73.1 114.928,76.728 R17.7@117.1,76.728
UNTERM9: NT9.3 R16.2 | length 7.3
  Top Layer w0.2: NT9.3@111,70 113.964,67.036 R16.2@117.1,67.036
UNTERM10: NT10.3 R16.4 | length 6.5
  Top Layer w0.2: NT10.3@111,66.9 113.1,66.9 114,66 117.064,66 R16.4@117.1,66.036
UNTERM11: NT11.3 R16.5 | length 6.9
  Top Layer w0.2: NT11.3@111,63.8 112.1,63.8 113.9,65.6 117.036,65.6 R16.5@117.1,65.536
UNTERM12: NT12.3 R16.7 | length 8.1
  Top Layer w0.2: NT12.3@111,60.7 111,61.4 114.1,64.5 117.064,64.5 R16.7@117.1,64.536
UNTERM13: NT13.3 R18.2 | length 10.4
  Top Layer w0.2: NT13.3@111,57.6 113.4,55.2 113.4,52.7 115.32,50.78 R18.2@117.1,50.78
UNTERM14: NT14.3 R18.4 | length 8.8
  Top Layer w0.2: NT14.3@111,54.5 111,53.2 114.4,49.8 117.08,49.8 R18.4@117.1,49.78
UNTERM15: NT15.3 R18.5 | length 7
  Top Layer w0.2: NT15.3@111,51.4 113.12,49.28 R18.5@117.1,49.28
UNTERM16: NT16.3 R18.7 | length 6.1
  Top Layer w0.2: NT16.3@111,48.3 117.08,48.3 R18.7@117.1,48.28
UNTERM17: NT17.3 R19.2 | length 7.8
  Top Layer w0.2: NT17.3@111,45.2 115.072,41.128 R19.2@117.1,41.128
UNTERM18: NT18.3 R19.4 | length 6.9
  Top Layer w0.2: NT18.3@111,42.1 112.2,42.1 114.2,40.1 117.072,40.1 R19.4@117.1,40.128
UNTERM19: NT19.3 R19.5 | length 6.4
  Top Layer w0.2: NT19.3@111,39 113.6,39 114.2,39.6 117.072,39.6 R19.5@117.1,39.628
UNTERM20: NT20.3 R19.7 | length 7.2
  Top Layer w0.2: NT20.3@111,35.9 111.8,35.9 114.528,38.628 R19.7@117.1,38.628
UNTERM21: NT21.3 R21.2@117.1,28.428 | length 7.9
  Top Layer w0.2: NT21.3@111,32.8 115.372,28.428 R21.2@117.1,28.428
UNTERM22: NT22.3 R21.4@117.1,27.428 | length 7.1
  Top Layer w0.2: NT22.3@111,29.7 112.5,29.7 114.8,27.4 117.072,27.4 R21.4@117.1,27.428
UNTERM23: NT23.3 R21.5@117.1,26.928 | length 6.3
  Top Layer w0.2: NT23.3@111,26.6 114.3,26.6 114.7,27 117.028,27 R21.5@117.1,26.928
UNTERM24: NT24.3 R21.7@117.1,25.928 | length 7.2
  Top Layer w0.2: NT24.3@111,23.5 112.4,23.5 114.9,26 117.028,26 R21.7@117.1,25.928
UNTERM25: NT25.3 R20.2 | length 7
  Top Layer w0.2: NT25.3@111,20.4 112.7,20.4 114.8,18.3 117.068,18.3 R20.2@117.1,18.268
UNTERM26: NT26.3 R20.4 | length 6.1
  Top Layer w0.2: NT26.3@111,17.3 117.068,17.3 R20.4@117.1,17.268
UNTERM27: NT27.3 R20.5 | length 7.2
  Top Layer w0.2: NT27.3@111,14.2 111.9,14.2 114.5,16.8 117.068,16.8 R20.5@117.1,16.768
UNTERM28: NT28.3 R20.7 | length 8.7
  Top Layer w0.2: NT28.3@111,11.1 111,12.2 114.6,15.8 117.068,15.8 R20.7@117.1,15.768
UNTERM29: NT29.3 R21.4@117.1,8.65 | length 6.4
  Top Layer w0.2: NT29.3@111,8 114.4,8 115.05,8.65 R21.4@117.1,8.65
UNTERM30: NT30.3 R21.6@117.1,7.65 | length 7.2
  Top Layer w0.2: NT30.3@111,4.9 112.5,4.9 115.25,7.65 R21.6@117.1,7.65
VIN: C1.1 C3.2 C4.2 J1.1 U1.1 X1.3 X1.4
pads on no net: R4.6 R4.7 R10.7 R10.8 R10.9 R10.10 R21.2@117.1,9.65 R21.3@117.1,9.15 R21.5@117.1,8.15 R21.7@117.1,7.15 R21.10@118.9,7.15 R21.12@118.9,8.15 R21.14@118.9,9.15 R21.15@118.9,9.65 X1.99 X1.100

## Polygon pours and split planes (outlines as drawn)
no net on Layer 1 (solid, pour order 64): 0.1,7 65.5,7 65.5,97.1 43.1,97.1 43.1,70.1 43.1,22.4 18.8,22.4 18.8,28.6 18.85,28.6 18.85,68.1 9.1,68.1 0.1,68.1 -11.2,68.1 -11.2,66.2 0.1,66.2 0.1,28.569
no net on Layer 1 "Layer 1-No Net" (solid, pour order 2): 61.4,91.1
no net on Layer 1 "Layer 1-No Net 1" (solid, pour order 0): 51.9,94.8
3V3 on Bottom Layer (solid, pour order 60): 0,7 65.5,7 65.5,97 43.1,97 43.1,69.6 43.1,22.3 18.7,22.3 18.7,28.5 18.75,28.5 18.75,68 9,68 0,68 -11.3,68 -11.3,66.1 0,66.1 0,28.469
5V0 on Bottom Layer (solid, pour order 68): 0,0 65.5,0 98,0 98,11 96,11 96,17 99,17 99,29 96,29 96,34 99,34 99,48 96,48 96,53 99,53 99,66 96,66 96.125,66.125 96.125,71.075 98.925,71.075 99,71 99,82 96,82 95.85,82.15 95.85,88.075 98.925,88.075 99,88 99,95 134,95 134,97.5 116.5,97.5 116.5,97 65.5,97 65.5,7 0,7
15V0 on Bottom Layer "Bottom Layer-15V0" (solid, pour order 46): 96.5,11.5 98.5,11.5 98.5,0 141.141,0 141.141,97.423 141,97.423 141,100 23.8,100 23.8,69.6 43.1,69.6 43.1,97.5 116,97.5 116.5,98 134,98 134.577,97.423 134.5,97.423 134.5,94.623 134.377,94.5 99.5,94.5 99.5,87.5 96.5,87.5 96.5,82.5 99.5,82.5 99.5,70.5 96.775,70.5 96.6,70.325 96.667,70.258 96.667,66.475 99.475,66.475 99.5,66.5 99.5,52.5 96.7,52.5 96.6,52.6 96.35,52.35 96.35,48.475 99.475,48.475 99.5,48.5 99.5,33.5 96.775,33.5 96.5,33.225 96.5,29.5 99.5,29.5 99.5,16.5 96.6,16.5 96.5,16.4
GND on Bottom Layer "Bottom Layer-GND" (solid, pour order 52): -11.2,65.8 -11.2,31.1 -10.8,30.7 -0.3,30.7 -0.3,65.8
VIN on Bottom Layer "Bottom Layer-VIN" (solid, pour order 50): -11.2,69.8 -11.2,72.2 -9,72.2 -6.475,74.725 0.031,74.725 0.031,100 21.3,100 21.3,69.8
15V0 on Bottom Layer "Bottom Layer-15V0 1" (solid, pour order 40): 138,96
5V0 on Bottom Layer "Bottom Layer-5V0" (solid, pour order 26): -13.9,68.21 -13.9,69.6 43.1,69.6 43.1,22.4 19.3,22.4 19.3,68.1
3V3 on Bottom Layer "Bottom Layer-3V3 1" (solid, pour order 16): -11,67.75
3V3 on Bottom Layer "Bottom Layer-3V3 2" (solid, pour order 14): -11,68
no net on Bottom Layer "Bottom Layer-No Net" (solid, pour order 8): -15,72
5V0 on Layer 2 "Layer 2-5V0" (solid, pour order 54): 19.3,34.2 19.3,0 43.1,0 43.1,34.2

## Keep-outs
Keep-Out Layer:
  rectangle: 17.2,0 141.2,3
  rectangle: 0,0 140,3
  region: 0,100 0,97 141,97 141,100

## Silkscreen, mask and mechanical layers (free items; w line width, h text height)
Mechanical 1:
  lines w0.254: 0,0 0,25.275 -0.013,25.275 -6.073,25.275 ccw(c-6.073,24.275) -7.073,24.275 -7.073,23.675 cw(c-7.473,23.675) -7.473,23.275 -8.853,23.275 -8.853,26.775 ccw(c-9.853,26.775) -9.853,27.775 -14.074,27.775 -14.853,27.775 -14.853,47.2 -14.074,47.2 -9.653,47.2 ccw(c-9.653,48.4) -9.653,49.6 -14.074,49.6 -14.853,49.6 -14.853,72.225 -14.074,72.225 -9.853,72.225 ccw(c-9.853,73.225) -8.853,73.225 -8.853,76.725 -7.473,76.725 cw(c-7.473,76.325) -7.073,76.325 -7.073,75.725 ccw(c-6.073,75.725) -6.073,74.725 -0.013,74.725 0.031,74.725 0.031,100 3.714,100 ; 3.713,100 141.141,100 ; 139.102,-1.333 139.102,98.667

## Dimensions
141.141,0 to 141.141,100 on Mechanical 2
146.143,97.802 to -14.84,72.216 on Mechanical 2
141.141,100 to -14.853,72.225 on Mechanical 2
141.141,100 to 0.031,100 on Mechanical 2

## Text inside footprints (layer, text, board x,y; h text height)
J2: Mechanical 1 "J1" at 143.387,29.622 h0.76 r270